# Altium PCB RF315Mhz.PcbDoc (part 3 of 5)
Units mil, origin at the board's own origin, x right, y up, seen from the top; angles counter-clockwise.
Board outline 4094.49 x 3779.53 mil, 2 copper layers (Top Layer, Bottom Layer); 180 components, 20 nets, 660 pads, 48 vias.
Unrouted connection lines stored in the file: 100.
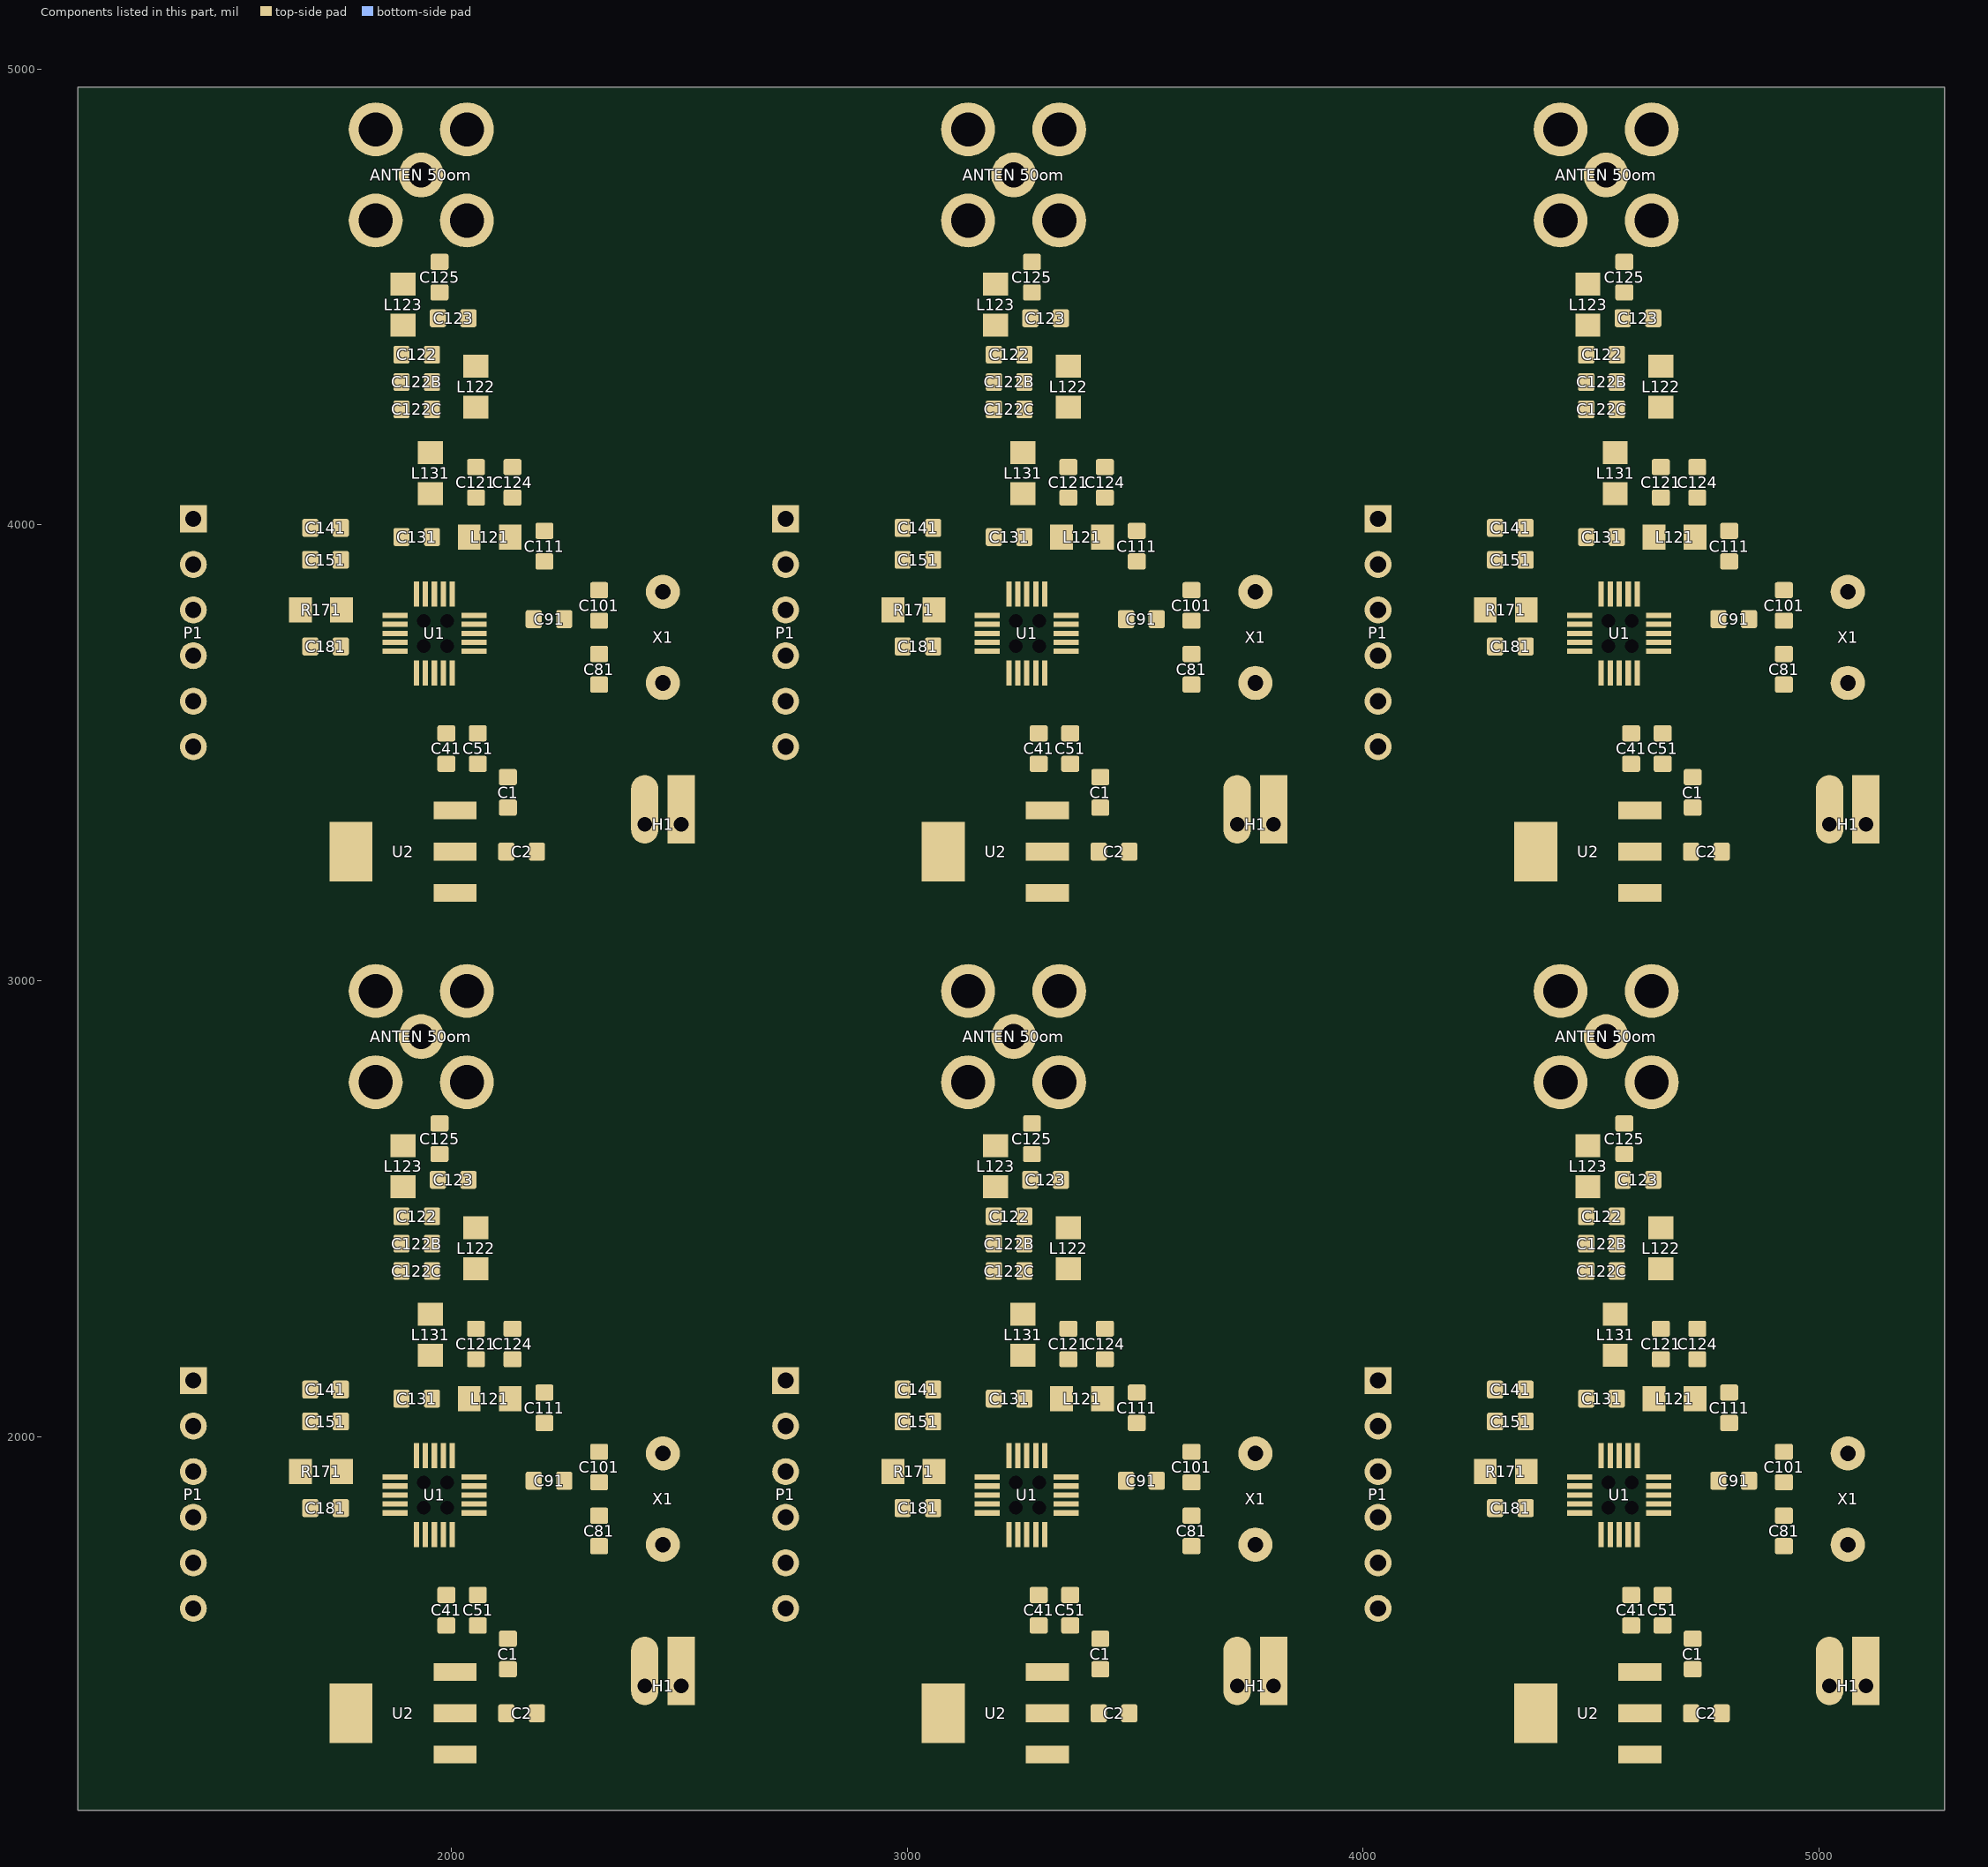
[diagram p3: the components of this part, seen from the top]

## Via types
v1: diameter 50, hole 28, Top Layer to Bottom Layer, 48 vias

## Nets (pads, with @x,y where several pads share a name; then routed paths per layer and width w, separated by ;. In a path a pad name is that pad's centre, name@x,y a point inside that pad or via, vN(x,y) a via of type N, cw(c..) or ccw(c..) an arc to the next point about the centre after c; other vN are vias at no path point) (continued)
copper on no net: (continued)
  Top Layer w1: 2516.57,4737.54 2519.57,4737.54 ; 2516.57,4738.54 2519.57,4738.54 ; 2516.57,4739.54 2519.57,4739.54 ; 2516.57,4740.54 2519.57,4740.54 ; 2516.57,4741.54 2519.57,4741.54 ; 2516.57,4742.54 2519.57,4742.54 ; 2516.57,4743.54 2519.57,4743.54 ; 2516.57,4744.54 2519.57,4744.54 ; 2516.57,4745.54 2519.57,4745.54 ; 2516.57,4746.54 2519.57,4746.54 ; 2516.57,4747.54 2519.57,4747.54 ; 2516.57,4748.54 2519.57,4748.54 ; 2516.57,4749.54 2519.57,4749.54 ; 2516.57,4750.54 2519.57,4750.54 ; 2516.57,4751.54 2519.57,4751.54 ; 2516.57,4752.54 2519.57,4752.54 ; 2516.57,4753.54 2519.57,4753.54 ; 2516.57,4754.54 2519.57,4754.54 ; 2516.57,4755.54 2519.57,4755.54 ; 2516.57,4756.54 2519.57,4756.54 ; 2516.57,4757.54 2519.57,4757.54 ; 2516.57,4758.54 2519.57,4758.54 ; 2516.57,4759.54 2519.57,4759.54 ; 2516.57,4760.54 2519.57,4760.54 ; 2516.57,4761.54 2519.57,4761.54 ; 2516.57,4762.54 2519.57,4762.54 ; 2516.57,4763.54 2519.57,4763.54 ; 2516.57,4764.54 2519.57,4764.54 ; 2516.57,4765.54 2519.57,4765.54 ; 2516.57,4766.54 2519.57,4766.54 ; 2516.57,4767.54 2519.57,4767.54 ; 2516.57,4768.54 2519.57,4768.54 ; 2516.57,4769.54 2519.57,4769.54 ; 2516.57,4770.54 2519.57,4770.54 ; 2516.57,4771.54 2519.57,4771.54 ; 2516.57,4772.54 2519.57,4772.54 ; 2516.57,4773.54 2519.57,4773.54 ; 2516.57,4774.54 2519.57,4774.54 ; 2516.57,4775.54 2519.57,4775.54 ; 2516.57,4776.54 2519.57,4776.54 ; 2516.57,4777.54 2519.57,4777.54 ; 2516.57,4778.54 2519.57,4778.54 ; 2516.57,4779.54 2519.57,4779.54 ; 2516.57,4780.54 2519.57,4780.54 ; 2516.57,4781.54 2519.57,4781.54 ; 2516.57,4782.54 2519.57,4782.54 ; 2516.57,4783.54 2519.57,4783.54 ; 2516.57,4784.54 2519.57,4784.54 ; 2516.57,4785.54 2519.57,4785.54 ; 2516.57,4786.54 2519.57,4786.54 ; 2516.57,4787.54 2519.57,4787.54 ; 2516.57,4788.54 2519.57,4788.54 ; 2516.57,4789.54 2519.57,4789.54 ; 2516.57,4790.54 2519.57,4790.54 ; 2516.57,4791.54 2519.57,4791.54 ; 2516.57,4792.54 2519.57,4792.54 ; 2516.57,4793.54 2519.57,4793.54 ; 2516.57,4794.54 2519.57,4794.54 ; 2516.57,4795.54 2519.57,4795.54 ; 2516.57,4796.54 2519.57,4796.54 ; 2516.57,4797.54 2519.57,4797.54 ; 2516.57,4798.54 2519.57,4798.54 ; 2516.57,4799.54 2519.57,4799.54 ; 2516.57,4800.54 2519.57,4800.54 ; 2516.57,4801.54 2519.57,4801.54 ; 2516.57,4802.54 2519.57,4802.54 ; 2516.57,4803.54 2519.57,4803.54 ; 2516.57,4804.54 2519.57,4804.54 ; 2516.57,4805.54 2519.57,4805.54 ; 2516.57,4806.54 2519.57,4806.54 ; 2516.57,4807.54 2519.57,4807.54 ; 2516.57,4808.54 2519.57,4808.54 ; 2516.57,4809.54 2519.57,4809.54 ; 2516.57,4810.54 2519.57,4810.54 ; 2516.57,4811.54 2519.57,4811.54 ; 2516.57,4812.54 2519.57,4812.54 ; 2516.57,4813.54 2519.57,4813.54 ; 2516.57,4814.54 2519.57,4814.54 ; 2516.57,4815.54 2519.57,4815.54 ; 2516.57,4816.54 2519.57,4816.54 ; 2516.57,4817.54 2519.57,4817.54 ; 2516.57,4818.54 2519.57,4818.54 ; 2516.57,4819.54 2519.57,4819.54 ; 2516.57,4820.54 2519.57,4820.54 ; 2516.57,4821.54 2519.57,4821.54 ; 2516.57,4822.54 2519.57,4822.54 ; 2516.57,4823.54 2519.57,4823.54 ; 2516.57,4824.54 2519.57,4824.54 ; 2516.57,4825.54 2519.57,4825.54 ; 2516.57,4826.54 2519.57,4826.54 ; 2516.57,4827.54 2519.57,4827.54 ; 2516.57,4828.54 2519.57,4828.54 ; 2516.57,4829.54 2519.57,4829.54 ; 2516.57,4830.54 2519.57,4830.54 ; 2516.57,4831.54 2519.57,4831.54 ; 2516.57,4832.54 2519.57,4832.54 ; 2516.57,4833.54 2519.57,4833.54 ; 2516.57,4834.54 2519.57,4834.54 ; 2516.57,4835.54 2519.57,4835.54 ; 2516.57,4836.54 2519.57,4836.54 ; 2516.57,4837.54 2519.57,4837.54 ; 2516.57,4838.54 2519.57,4838.54 ; 2516.57,4839.54 2519.57,4839.54 ; 2516.57,4840.54 2519.57,4840.54 ; 2516.57,4841.54 2519.57,4841.54 ; 3618.78,2807.78 3621.78,2807.78 ; 3618.78,2808.78 3621.78,2808.78 ; 3618.78,2809.78 3621.78,2809.78 ; 3618.78,2810.78 3621.78,2810.78 ; 3618.78,2811.78 3621.78,2811.78 ; 3618.78,2812.78 3621.78,2812.78 ; 3618.78,2813.78 3621.78,2813.78 ; 3618.78,2814.78 3621.78,2814.78 ; 3618.78,2815.78 3621.78,2815.78 ; 3618.78,2816.78 3621.78,2816.78 ; 3618.78,2817.78 3621.78,2817.78 ; 3618.78,2818.78 3621.78,2818.78 ; 3618.78,2819.78 3621.78,2819.78 ; 3618.78,2820.78 3621.78,2820.78 ; 3618.78,2821.78 3621.78,2821.78 ; 3618.78,2822.78 3621.78,2822.78 ; 3618.78,2823.78 3621.78,2823.78 ; 3618.78,2824.78 3621.78,2824.78 ; 3618.78,2825.78 3621.78,2825.78 ; 3618.78,2826.78 3621.78,2826.78 ; 3618.78,2827.78 3621.78,2827.78 ; 3618.78,2828.78 3621.78,2828.78 ; 3618.78,2829.78 3621.78,2829.78 ; 3618.78,2830.78 3621.78,2830.78 ; 3618.78,2831.78 3621.78,2831.78 ; 3618.78,2832.78 3621.78,2832.78 ; 3618.78,2833.78 3621.78,2833.78 ; 3618.78,2834.78 3621.78,2834.78 ; 3618.78,2835.78 3621.78,2835.78 ; 3618.78,2836.78 3621.78,2836.78 ; 3618.78,2837.78 3621.78,2837.78 ; 3618.78,2838.78 3621.78,2838.78 ; 3618.78,2839.78 3621.78,2839.78 ; 3618.78,2840.78 3621.78,2840.78 ; 3618.78,2841.78 3621.78,2841.78 ; 3618.78,2842.78 3621.78,2842.78 ; 3618.78,2843.78 3621.78,2843.78 ; 3618.78,2844.78 3621.78,2844.78 ; 3618.78,2845.78 3621.78,2845.78 ; 3618.78,2846.78 3621.78,2846.78 ; 3618.78,2847.78 3621.78,2847.78 ; 3618.78,2848.78 3621.78,2848.78 ; 3618.78,2849.78 3621.78,2849.78 ; 3618.78,2850.78 3621.78,2850.78 ; 3618.78,2851.78 3621.78,2851.78 ; 3618.78,2852.78 3621.78,2852.78 ; 3618.78,2853.78 3621.78,2853.78 ; 3618.78,2854.78 3621.78,2854.78 ; 3618.78,2855.78 3621.78,2855.78 ; 3618.78,2856.78 3621.78,2856.78 ; 3618.78,2857.78 3621.78,2857.78 ; 3618.78,2858.78 3621.78,2858.78 ; 3618.78,2859.78 3621.78,2859.78 ; 3618.78,2860.78 3621.78,2860.78 ; 3618.78,2861.78 3621.78,2861.78 ; 3618.78,2862.78 3621.78,2862.78 ; 3618.78,2863.78 3621.78,2863.78 ; 3618.78,2864.78 3621.78,2864.78 ; 3618.78,2865.78 3621.78,2865.78 ; 3618.78,2866.78 3621.78,2866.78 ; 3618.78,2867.78 3621.78,2867.78 ; 3618.78,2868.78 3621.78,2868.78 ; 3618.78,2869.78 3621.78,2869.78 ; 3618.78,2870.78 3621.78,2870.78 ; 3618.78,2871.78 3621.78,2871.78 ; 3618.78,2872.78 3621.78,2872.78 ; 3618.78,2873.78 3621.78,2873.78 ; 3618.78,2874.78 3621.78,2874.78 ; 3618.78,2875.78 3621.78,2875.78 ; 3618.78,2876.78 3621.78,2876.78 ; 3618.78,2877.78 3621.78,2877.78 ; 3618.78,2878.78 3621.78,2878.78 ; 3618.78,2879.78 3621.78,2879.78 ; 3618.78,2880.78 3621.78,2880.78 ; 3618.78,2881.78 3621.78,2881.78 ; 3618.78,2882.78 3621.78,2882.78 ; 3618.78,2883.78 3621.78,2883.78 ; 3618.78,2884.78 3621.78,2884.78 ; 3618.78,2885.78 3621.78,2885.78 ; 3618.78,2886.78 3621.78,2886.78 ; 3618.78,2887.78 3621.78,2887.78 ; 3618.78,2888.78 3621.78,2888.78 ; 3618.78,2889.78 3621.78,2889.78 ; 3618.78,2890.78 3621.78,2890.78 ; 3618.78,2891.78 3621.78,2891.78 ; 3618.78,2892.78 3621.78,2892.78 ; 3618.78,2893.78 3621.78,2893.78 ; 3618.78,2894.78 3621.78,2894.78 ; 3618.78,2895.78 3621.78,2895.78 ; 3618.78,2896.78 3621.78,2896.78 ; 3618.78,2897.78 3621.78,2897.78 ; 3618.78,2898.78 3621.78,2898.78 ; 3618.78,2899.78 3621.78,2899.78 ; 3618.78,2900.78 3621.78,2900.78 ; 3618.78,2901.78 3621.78,2901.78 ; 3618.78,2902.78 3621.78,2902.78 ; 3618.78,2903.78 3621.78,2903.78 ; 3618.78,2904.78 3621.78,2904.78 ; 3618.78,2905.78 3621.78,2905.78 ; 3618.78,2906.78 3621.78,2906.78 ; 3618.78,2907.78 3621.78,2907.78 ; 3618.78,2908.78 3621.78,2908.78 ; 3618.78,2909.78 3621.78,2909.78 ; 3618.78,2910.78 3621.78,2910.78 ; 3618.78,2911.78 3621.78,2911.78 ; 3618.78,2912.78 3621.78,2912.78 ; 3618.78,2913.78 3621.78,2913.78 ; 3618.78,2914.78 3621.78,2914.78 ; 3618.78,2915.78 3621.78,2915.78 ; 3618.78,2916.78 3621.78,2916.78 ; 3618.78,2917.78 3621.78,2917.78 ; 3618.78,2918.78 3621.78,2918.78 ; 3618.78,2919.78 3621.78,2919.78 ; 3618.78,2920.78 3621.78,2920.78 ; 3618.78,2921.78 3621.78,2921.78 ; 3618.78,2922.78 3621.78,2922.78 ; 3618.78,2923.78 3621.78,2923.78 ; 3618.78,2924.78 3621.78,2924.78 ; 3618.78,2925.78 3621.78,2925.78 ; 3618.78,2926.78 3621.78,2926.78 ; 3618.78,2927.78 3621.78,2927.78 ; 3618.78,2928.78 3621.78,2928.78 ; 3618.78,2929.78 3621.78,2929.78 ; 3618.78,2930.78 3621.78,2930.78 ; 3618.78,2931.78 3621.78,2931.78 ; 3618.78,2932.78 3621.78,2932.78 ; 3618.78,2933.78 3621.78,2933.78 ; 3618.78,2934.78 3621.78,2934.78 ; 3618.78,2935.78 3621.78,2935.78 ; 3618.78,2936.78 3621.78,2936.78 ; 3618.78,2937.78 3621.78,2937.78 ; 3618.78,2938.78 3621.78,2938.78 ; 3618.78,2939.78 3621.78,2939.78 ; 3618.78,2940.78 3621.78,2940.78 ; 3618.78,2941.78 3621.78,2941.78 ; 3618.78,2942.78 3621.78,2942.78 ; 3618.78,2943.78 3621.78,2943.78 ; 3618.78,2944.78 3621.78,2944.78 ; 3618.78,2945.78 3621.78,2945.78 ; 3618.78,2946.78 3621.78,2946.78 ; 3618.78,2947.78 3621.78,2947.78 ; 3618.78,2948.78 3621.78,2948.78 ; 3618.78,2949.78 3621.78,2949.78 ; 3618.78,2950.78 3621.78,2950.78 ; 3618.78,2951.78 3621.78,2951.78 ; 3618.78,2952.78 3621.78,2952.78 ; 3618.78,2953.78 3622.78,2953.78 ; 3618.78,4697.54 3621.78,4697.54 ; 3618.78,4698.54 3621.78,4698.54 ; 3618.78,4699.54 3621.78,4699.54 ; 3618.78,4700.54 3621.78,4700.54 ; 3618.78,4701.54 3621.78,4701.54 ; 3618.78,4702.54 3621.78,4702.54 ; 3618.78,4703.54 3621.78,4703.54 ; 3618.78,4704.54 3621.78,4704.54 ; 3618.78,4705.54 3621.78,4705.54 ; 3618.78,4706.54 3621.78,4706.54 ; 3618.78,4707.54 3621.78,4707.54 ; 3618.78,4708.54 3621.78,4708.54 ; 3618.78,4709.54 3621.78,4709.54 ; 3618.78,4710.54 3621.78,4710.54 ; 3618.78,4711.54 3621.78,4711.54 ; 3618.78,4712.54 3621.78,4712.54 ; 3618.78,4713.54 3621.78,4713.54 ; 3618.78,4714.54 3621.78,4714.54 ; 3618.78,4715.54 3621.78,4715.54 ; 3618.78,4716.54 3621.78,4716.54 ; 3618.78,4717.54 3621.78,4717.54 ; 3618.78,4718.54 3621.78,4718.54 ; 3618.78,4719.54 3621.78,4719.54 ; 3618.78,4720.54 3621.78,4720.54 ; 3618.78,4721.54 3621.78,4721.54 ; 3618.78,4722.54 3621.78,4722.54 ; 3618.78,4723.54 3621.78,4723.54 ; 3618.78,4724.54 3621.78,4724.54 ; 3618.78,4725.54 3621.78,4725.54 ; 3618.78,4726.54 3621.78,4726.54 ; 3618.78,4727.54 3621.78,4727.54 ; 3618.78,4728.54 3621.78,4728.54 ; 3618.78,4729.54 3621.78,4729.54 ; 3618.78,4730.54 3621.78,4730.54 ; 3618.78,4731.54 3621.78,4731.54 ; 3618.78,4732.54 3621.78,4732.54 ; 3618.78,4733.54 3621.78,4733.54 ; 3618.78,4734.54 3621.78,4734.54 ; 3618.78,4735.54 3621.78,4735.54 ; 3618.78,4736.54 3621.78,4736.54 ; 3618.78,4737.54 3621.78,4737.54 ; 3618.78,4738.54 3621.78,4738.54 ; 3618.78,4739.54 3621.78,4739.54 ; 3618.78,4740.54 3621.78,4740.54 ; 3618.78,4741.54 3621.78,4741.54 ; 3618.78,4742.54 3621.78,4742.54 ; 3618.78,4743.54 3621.78,4743.54 ; 3618.78,4744.54 3621.78,4744.54 ; 3618.78,4745.54 3621.78,4745.54 ; 3618.78,4746.54 3621.78,4746.54 ; 3618.78,4747.54 3621.78,4747.54 ; 3618.78,4748.54 3621.78,4748.54 ; 3618.78,4749.54 3621.78,4749.54 ; 3618.78,4750.54 3621.78,4750.54 ; 3618.78,4751.54 3621.78,4751.54 ; 3618.78,4752.54 3621.78,4752.54 ; 3618.78,4753.54 3621.78,4753.54 ; 3618.78,4754.54 3621.78,4754.54 ; 3618.78,4755.54 3621.78,4755.54 ; 3618.78,4756.54 3621.78,4756.54 ; 3618.78,4757.54 3621.78,4757.54 ; 3618.78,4758.54 3621.78,4758.54 ; 3618.78,4759.54 3621.78,4759.54 ; 3618.78,4760.54 3621.78,4760.54 ; 3618.78,4761.54 3621.78,4761.54 ; 3618.78,4762.54 3621.78,4762.54 ; 3618.78,4763.54 3621.78,4763.54 ; 3618.78,4764.54 3621.78,4764.54 ; 3618.78,4765.54 3621.78,4765.54 ; 3618.78,4766.54 3621.78,4766.54 ; 3618.78,4767.54 3621.78,4767.54 ; 3618.78,4768.54 3621.78,4768.54 ; 3618.78,4769.54 3621.78,4769.54 ; 3618.78,4770.54 3621.78,4770.54 ; 3618.78,4771.54 3621.78,4771.54 ; 3618.78,4772.54 3621.78,4772.54 ; 3618.78,4773.54 3621.78,4773.54 ; 3618.78,4774.54 3621.78,4774.54 ; 3618.78,4775.54 3621.78,4775.54 ; 3618.78,4776.54 3621.78,4776.54 ; 3618.78,4777.54 3621.78,4777.54 ; 3618.78,4778.54 3621.78,4778.54 ; 3618.78,4779.54 3621.78,4779.54 ; 3618.78,4780.54 3621.78,4780.54 ; 3618.78,4781.54 3621.78,4781.54 ; 3618.78,4782.54 3621.78,4782.54 ; 3618.78,4783.54 3621.78,4783.54 ; 3618.78,4784.54 3621.78,4784.54 ; 3618.78,4785.54 3621.78,4785.54 ; 3618.78,4786.54 3621.78,4786.54 ; 3618.78,4787.54 3621.78,4787.54 ; 3618.78,4788.54 3621.78,4788.54 ; 3618.78,4789.54 3621.78,4789.54 ; 3618.78,4790.54 3621.78,4790.54 ; 3618.78,4791.54 3621.78,4791.54 ; 3618.78,4792.54 3621.78,4792.54 ; 3618.78,4793.54 3621.78,4793.54 ; 3618.78,4794.54 3621.78,4794.54 ; 3618.78,4795.54 3621.78,4795.54 ; 3618.78,4796.54 3621.78,4796.54 ; 3618.78,4797.54 3621.78,4797.54 ; 3618.78,4798.54 3621.78,4798.54 ; 3618.78,4799.54 3621.78,4799.54 ; 3618.78,4800.54 3621.78,4800.54 ; 3618.78,4801.54 3621.78,4801.54 ; 3618.78,4802.54 3621.78,4802.54 ; 3618.78,4803.54 3621.78,4803.54 ; 3618.78,4804.54 3621.78,4804.54 ; 3618.78,4805.54 3621.78,4805.54 ; 3618.78,4806.54 3621.78,4806.54 ; 3618.78,4807.54 3621.78,4807.54 ; 3618.78,4808.54 3621.78,4808.54 ; 3618.78,4809.54 3621.78,4809.54 ; 3618.78,4810.54 3621.78,4810.54 ; 3618.78,4811.54 3621.78,4811.54 ; 3618.78,4812.54 3621.78,4812.54 ; 3618.78,4813.54 3621.78,4813.54 ; 3618.78,4814.54 3621.78,4814.54 ; 3618.78,4815.54 3621.78,4815.54 ; 3618.78,4816.54 3621.78,4816.54 ; 3618.78,4817.54 3621.78,4817.54 ; 3618.78,4818.54 3621.78,4818.54 ; 3618.78,4819.54 3621.78,4819.54 ; 3618.78,4820.54 3621.78,4820.54 ; 3618.78,4821.54 3621.78,4821.54 ; 3618.78,4822.54 3621.78,4822.54 ; 3618.78,4823.54 3621.78,4823.54 ; 3618.78,4824.54 3621.78,4824.54 ; 3618.78,4825.54 3621.78,4825.54 ; 3618.78,4826.54 3621.78,4826.54 ; 3618.78,4827.54 3621.78,4827.54 ; 3618.78,4828.54 3621.78,4828.54 ; 3618.78,4829.54 3621.78,4829.54 ; 3618.78,4830.54 3621.78,4830.54 ; 3618.78,4831.54 3621.78,4831.54 ; 3618.78,4832.54 3621.78,4832.54 ; 3618.78,4833.54 3621.78,4833.54 ; 3618.78,4834.54 3621.78,4834.54 ; 3618.78,4835.54 3621.78,4835.54 ; 3618.78,4836.54 3621.78,4836.54 ; 3618.78,4837.54 3621.78,4837.54 ; 3618.78,4838.54 3621.78,4838.54 ; 3618.78,4839.54 3621.78,4839.54 ; 3618.78,4840.54 3621.78,4840.54 ; 3618.78,4841.54 3621.78,4841.54 ; 3618.78,4842.54 3621.78,4842.54 ; 3618.78,4843.54 3622.78,4843.54 ; 3619.78,2803.78 3623.78,2803.78 ; 3619.78,2804.78 3622.78,2804.78 ; 3619.78,2805.78 3622.78,2805.78 ; 3619.78,2806.78 3622.78,2806.78 ; 3619.78,2954.78 3622.78,2954.78 ; 3619.78,2955.78 3622.78,2955.78 ; 3619.78,2956.78 3623.78,2956.78 ; 3619.78,4693.54 3623.78,4693.54 ; 3619.78,4694.54 3622.78,4694.54 ; 3619.78,4695.54 3622.78,4695.54 ; 3619.78,4696.54 3622.78,4696.54 ; 3619.78,4844.54 3622.78,4844.54 ; 3619.78,4845.54 3622.78,4845.54 ; 3619.78,4846.54 3623.78,4846.54 ; 3620.78,2801.78 3623.78,2801.78 ; 3620.78,2802.78 3623.78,2802.78 ; 3620.78,2957.78 3623.78,2957.78 ; 3620.78,2958.78 3623.78,2958.78 ; 3620.78,2959.78 3624.78,2959.78 ; 3620.78,4691.54 3623.78,4691.54 ; 3620.78,4692.54 3623.78,4692.54 ; 3620.78,4847.54 3623.78,4847.54 ; 3620.78,4848.54 3623.78,4848.54 ; 3620.78,4849.54 3624.78,4849.54 ; 3621.78,2799.78 3624.78,2799.78 ; 3621.78,2800.78 3624.78,2800.78 ; 3621.78,2960.78 3624.78,2960.78 ; 3621.78,2961.78 3625.78,2961.78 ; 3621.78,4689.54 3624.78,4689.54 ; 3621.78,4690.54 3624.78,4690.54 ; 3621.78,4850.54 3624.78,4850.54 ; 3621.78,4851.54 3625.78,4851.54 ; 3622.78,2797.78 3626.78,2797.78 ; 3622.78,2798.78 3625.78,2798.78 ; 3622.78,2962.78 3625.78,2962.78 ; 3622.78,2963.78 3626.78,2963.78 ; 3622.78,4687.54 3626.78,4687.54 ; 3622.78,4688.54 3625.78,4688.54 ; 3622.78,4852.54 3625.78,4852.54 ; 3622.78,4853.54 3626.78,4853.54 ; 3623.78,2795.78 3627.78,2795.78 ; 3623.78,2796.78 3626.78,2796.78 ; 3623.78,2964.78 3627.78,2964.78 ; 3623.78,4685.54 3627.78,4685.54 ; 3623.78,4686.54 3626.78,4686.54 ; 3623.78,4854.54 3627.78,4854.54 ; 3624.78,2794.78 3628.78,2794.78 ; 3624.78,2965.78 3628.78,2965.78 ; 3624.78,2966.78 3628.78,2966.78 ; 3624.78,4684.54 3628.78,4684.54 ; 3624.78,4855.54 3628.78,4855.54 ; 3624.78,4856.54 3628.78,4856.54 ; 3625.78,2792.78 3629.78,2792.78 ; 3625.78,2793.78 3629.78,2793.78 ; 3625.78,2967.78 3629.78,2967.78 ; 3625.78,4682.54 3629.78,4682.54 ; 3625.78,4683.54 3629.78,4683.54 ; 3625.78,4857.54 3629.78,4857.54 ; 3626.78,2791.78 3630.78,2791.78 ; 3626.78,2968.78 3630.78,2968.78 ; 3626.78,4681.54 3630.78,4681.54 ; 3626.78,4858.54 3630.78,4858.54 ; 3627.78,2790.78 3632.78,2790.78 ; 3627.78,2969.78 3631.78,2969.78 ; 3627.78,4680.54 3632.78,4680.54 ; 3627.78,4859.54 3631.78,4859.54 ; 3628.78,2789.78 3633.78,2789.78 ; 3628.78,2970.78 3633.78,2970.78 ; 3628.78,4679.54 3633.78,4679.54 ; 3628.78,4860.54 3633.78,4860.54 ; 3629.78,2788.78 3634.78,2788.78 ; 3629.78,2971.78 3634.78,2971.78 ; 3629.78,4678.54 3634.78,4678.54 ; 3629.78,4861.54 3634.78,4861.54 ; 3630.78,2972.78 3635.78,2972.78 ; 3630.78,4862.54 3635.78,4862.54 ; 3631.78,2787.78 3636.78,2787.78 ; 3631.78,2973.78 3637.78,2973.78 ; 3631.78,4677.54 3636.78,4677.54 ; 3631.78,4863.54 3637.78,4863.54 ; 3632.78,2786.78 3637.78,2786.78 ; 3632.78,4676.54 3637.78,4676.54 ; 3633.78,2785.78 3640.78,2785.78 ; 3633.78,2974.78 3639.78,2974.78 ; 3633.78,4675.54 3640.78,4675.54 ; 3633.78,4864.54 3639.78,4864.54 ; 3634.78,2975.78 3642.78,2975.78 ; 3634.78,4865.54 3642.78,4865.54 ; 3635.78,2784.78 3642.78,2784.78 ; 3635.78,2950.78 3657.78,2950.78 ; 3635.78,2951.78 3656.78,2951.78 ; 3635.78,2952.78 3655.78,2952.78 ; 3635.78,2953.78 3655.78,2953.78 ; 3635.78,2954.78 3655.78,2954.78 ; 3635.78,2955.78 3655.78,2955.78 ; 3635.78,2956.78 3654.78,2956.78 ; 3635.78,4674.54 3642.78,4674.54 ; 3635.78,4840.54 3657.78,4840.54 ; 3635.78,4841.54 3656.78,4841.54 ; 3635.78,4842.54 3655.78,4842.54 ; 3635.78,4843.54 3655.78,4843.54 ; 3635.78,4844.54 3655.78,4844.54 ; 3635.78,4845.54 3655.78,4845.54 ; 3635.78,4846.54 3654.78,4846.54 ; 3636.78,2948.78 3659.78,2948.78 ; 3636.78,2949.78 3658.78,2949.78 ; 3636.78,2957.78 3654.78,2957.78 ; 3636.78,2958.78 3653.78,2958.78 ; 3636.78,2976.78 3645.78,2976.78 ; 3636.78,4838.54 3659.78,4838.54 ; 3636.78,4839.54 3658.78,4839.54 ; 3636.78,4847.54 3654.78,4847.54 ; 3636.78,4848.54 3653.78,4848.54 ; 3636.78,4866.54 3645.78,4866.54 ; 3637.78,2783.78 3646.78,2783.78 ; 3637.78,2946.78 3661.78,2946.78 ; 3637.78,2947.78 3660.78,2947.78 ; 3637.78,2959.78 3653.78,2959.78 ; 3637.78,4673.54 3646.78,4673.54 ; 3637.78,4836.54 3661.78,4836.54 ; 3637.78,4837.54 3660.78,4837.54 ; 3637.78,4849.54 3653.78,4849.54 ; 3638.78,2800.78 3641.78,2800.78 ; 3638.78,2801.78 3647.78,2801.78 ; 3638.78,2802.78 3653.78,2802.78 ; 3638.78,2803.78 3659.78,2803.78 ; 3638.78,2804.78 3660.78,2804.78 ; 3638.78,2945.78 3662.78,2945.78 ; 3638.78,2960.78 3652.78,2960.78 ; 3638.78,2977.78 3797.78,2977.78 ; 3638.78,4690.54 3641.78,4690.54 ; 3638.78,4691.54 3647.78,4691.54 ; 3638.78,4692.54 3653.78,4692.54 ; 3638.78,4693.54 3659.78,4693.54 ; 3638.78,4694.54 3660.78,4694.54 ; 3638.78,4835.54 3662.78,4835.54 ; 3638.78,4850.54 3652.78,4850.54 ; 3638.78,4867.54 3797.78,4867.54 ; 3639.78,2782.78 3797.78,2782.78 ; 3639.78,2805.78 3661.78,2805.78 ; 3639.78,2806.78 3662.78,2806.78 ; 3639.78,2807.78 3663.78,2807.78 ; 3639.78,2808.78 3664.78,2808.78 ; 3639.78,2809.78 3665.78,2809.78 ; 3639.78,2810.78 3666.78,2810.78 ; 3639.78,2961.78 3650.78,2961.78 ; 3639.78,4672.54 3797.78,4672.54 ; 3639.78,4695.54 3661.78,4695.54 ; 3639.78,4696.54 3662.78,4696.54 ; 3639.78,4697.54 3663.78,4697.54 ; 3639.78,4698.54 3664.78,4698.54 ; 3639.78,4699.54 3665.78,4699.54 ; 3639.78,4700.54 3666.78,4700.54 ; 3639.78,4851.54 3650.78,4851.54 ; 3640.78,2811.78 3667.78,2811.78 ; 3640.78,2812.78 3668.78,2812.78 ; 3640.78,2813.78 3669.78,2813.78 ; 3640.78,2814.78 3670.78,2814.78 ; 3640.78,2815.78 3671.78,2815.78 ; 3640.78,2816.78 3672.78,2816.78 ; 3640.78,2944.78 3663.78,2944.78 ; 3640.78,4701.54 3667.78,4701.54 ; 3640.78,4702.54 3668.78,4702.54 ; 3640.78,4703.54 3669.78,4703.54 ; 3640.78,4704.54 3670.78,4704.54 ; 3640.78,4705.54 3671.78,4705.54 ; 3640.78,4706.54 3672.78,4706.54 ; 3640.78,4834.54 3663.78,4834.54 ; 3641.78,2817.78 3673.78,2817.78 ; 3641.78,2818.78 3674.78,2818.78 ; 3641.78,2819.78 3675.78,2819.78 ; 3641.78,2820.78 3676.78,2820.78 ; 3641.78,2962.78 3648.78,2962.78 ; 3641.78,2978.78 3795.78,2978.78 ; 3641.78,4707.54 3673.78,4707.54 ; 3641.78,4708.54 3674.78,4708.54 ; 3641.78,4709.54 3675.78,4709.54 ; 3641.78,4710.54 3676.78,4710.54 ; 3641.78,4852.54 3648.78,4852.54 ; 3641.78,4868.54 3795.78,4868.54 ; 3642.78,2781.78 3794.78,2781.78 ; 3642.78,2821.78 3677.78,2821.78 ; 3642.78,2943.78 3664.78,2943.78 ; 3642.78,4671.54 3794.78,4671.54 ; 3642.78,4711.54 3677.78,4711.54 ; 3642.78,4833.54 3664.78,4833.54 ; 3643.78,2822.78 3678.78,2822.78 ; 3643.78,4712.54 3678.78,4712.54 ; 3644.78,2823.78 3679.78,2823.78 ; 3644.78,2979.78 3791.78,2979.78 ; 3644.78,4713.54 3679.78,4713.54 ; 3644.78,4869.54 3791.78,4869.54 ; 3645.78,2780.78 3790.78,2780.78 ; 3645.78,2824.78 3680.78,2824.78 ; 3645.78,2894.78 3647.78,2894.78 ; 3645.78,4670.54 3790.78,4670.54 ; 3645.78,4714.54 3680.78,4714.54 ; 3645.78,4784.54 3647.78,4784.54 ; 3646.78,2825.78 3681.78,2825.78 ; 3646.78,2895.78 3650.78,2895.78 ; 3646.78,2942.78 3665.78,2942.78 ; 3646.78,4715.54 3681.78,4715.54 ; 3646.78,4785.54 3650.78,4785.54 ; 3646.78,4832.54 3665.78,4832.54 ; 3647.78,2826.78 3682.78,2826.78 ; 3647.78,2896.78 3653.78,2896.78 ; 3647.78,2941.78 3666.78,2941.78 ; 3647.78,4716.54 3682.78,4716.54 ; 3647.78,4786.54 3653.78,4786.54 ; 3647.78,4831.54 3666.78,4831.54 ; 3648.78,2827.78 3683.78,2827.78 ; 3648.78,2897.78 3656.78,2897.78 ; 3648.78,2940.78 3667.78,2940.78 ; 3648.78,4717.54 3683.78,4717.54 ; 3648.78,4787.54 3656.78,4787.54 ; 3648.78,4830.54 3667.78,4830.54 ; 3649.78,2828.78 3684.78,2828.78 ; 3649.78,2898.78 3659.78,2898.78 ; 3649.78,2939.78 3668.78,2939.78 ; 3649.78,4718.54 3684.78,4718.54 ; 3649.78,4788.54 3659.78,4788.54 ; 3649.78,4829.54 3668.78,4829.54 ; 3650.78,2829.78 3685.78,2829.78 ; 3650.78,2899.78 3661.78,2899.78 ; 3650.78,2938.78 3669.78,2938.78 ; 3650.78,4719.54 3685.78,4719.54 ; 3650.78,4789.54 3661.78,4789.54 ; 3650.78,4828.54 3669.78,4828.54 ; 3651.78,2830.78 3686.78,2830.78 ; 3651.78,2900.78 3664.78,2900.78 ; 3651.78,2937.78 3670.78,2937.78 ; 3651.78,4720.54 3686.78,4720.54 ; 3651.78,4790.54 3664.78,4790.54 ; 3651.78,4827.54 3670.78,4827.54 ; 3652.78,2831.78 3687.78,2831.78 ; 3652.78,2901.78 3667.78,2901.78 ; 3652.78,2936.78 3671.78,2936.78 ; 3652.78,4721.54 3687.78,4721.54 ; 3652.78,4791.54 3667.78,4791.54 ; 3652.78,4826.54 3671.78,4826.54 ; 3653.78,2832.78 3688.78,2832.78 ; 3653.78,2902.78 3668.78,2902.78 ; 3653.78,2935.78 3672.78,2935.78 ; 3653.78,4722.54 3688.78,4722.54 ; 3653.78,4792.54 3668.78,4792.54 ; 3653.78,4825.54 3672.78,4825.54 ; 3654.78,2833.78 3689.78,2833.78 ; 3654.78,2903.78 3669.78,2903.78 ; 3654.78,2934.78 3673.78,2934.78 ; 3654.78,4723.54 3689.78,4723.54 ; 3654.78,4793.54 3669.78,4793.54 ; 3654.78,4824.54 3673.78,4824.54 ; 3655.78,2834.78 3690.78,2834.78 ; 3655.78,2904.78 3670.78,2904.78 ; 3655.78,2933.78 3674.78,2933.78 ; 3655.78,4724.54 3690.78,4724.54 ; 3655.78,4794.54 3670.78,4794.54 ; 3655.78,4823.54 3674.78,4823.54 ; 3656.78,2835.78 3691.78,2835.78 ; 3656.78,2905.78 3671.78,2905.78 ; 3656.78,2932.78 3675.78,2932.78 ; 3656.78,4725.54 3691.78,4725.54 ; 3656.78,4795.54 3671.78,4795.54 ; 3656.78,4822.54 3675.78,4822.54 ; 3657.78,2836.78 3692.78,2836.78 ; 3657.78,2906.78 3672.78,2906.78 ; 3657.78,2931.78 3676.78,2931.78 ; 3657.78,4726.54 3692.78,4726.54 ; 3657.78,4796.54 3672.78,4796.54 ; 3657.78,4821.54 3676.78,4821.54 ; 3658.78,2837.78 3693.78,2837.78 ; 3658.78,2907.78 3708.78,2907.78 ; 3658.78,2930.78 3677.78,2930.78 ; 3658.78,4727.54 3693.78,4727.54 ; 3658.78,4797.54 3708.78,4797.54 ; 3658.78,4820.54 3677.78,4820.54 ; 3659.78,2838.78 3694.78,2838.78 ; 3659.78,2908.78 3707.78,2908.78 ; 3659.78,2929.78 3678.78,2929.78 ; 3659.78,4728.54 3694.78,4728.54 ; 3659.78,4798.54 3707.78,4798.54 ; 3659.78,4819.54 3678.78,4819.54 ; 3660.78,2839.78 3695.78,2839.78 ; 3660.78,2909.78 3706.78,2909.78 ; 3660.78,2928.78 3694.78,2928.78 ; 3660.78,4729.54 3695.78,4729.54 ; 3660.78,4799.54 3706.78,4799.54 ; 3660.78,4818.54 3694.78,4818.54 ; 3661.78,2840.78 3696.78,2840.78 ; 3661.78,2910.78 3705.78,2910.78 ; 3661.78,2927.78 3693.78,2927.78 ; 3661.78,4730.54 3696.78,4730.54 ; 3661.78,4800.54 3705.78,4800.54 ; 3661.78,4817.54 3693.78,4817.54 ; 3662.78,2841.78 3697.78,2841.78 ; 3662.78,2911.78 3704.78,2911.78 ; 3662.78,2926.78 3692.78,2926.78 ; 3662.78,4731.54 3697.78,4731.54 ; 3662.78,4801.54 3704.78,4801.54 ; 3662.78,4816.54 3692.78,4816.54 ; 3663.78,2842.78 3698.78,2842.78 ; 3663.78,2912.78 3703.78,2912.78 ; 3663.78,2925.78 3691.78,2925.78 ; 3663.78,4732.54 3698.78,4732.54 ; 3663.78,4802.54 3703.78,4802.54 ; 3663.78,4815.54 3691.78,4815.54 ; 3664.78,2843.78 3699.78,2843.78 ; 3664.78,2913.78 3702.78,2913.78 ; 3664.78,2924.78 3691.78,2924.78 ; 3664.78,4733.54 3699.78,4733.54 ; 3664.78,4803.54 3702.78,4803.54 ; 3664.78,4814.54 3691.78,4814.54 ; 3665.78,2844.78 3700.78,2844.78 ; 3665.78,2914.78 3701.78,2914.78 ; 3665.78,2923.78 3692.78,2923.78 ; 3665.78,4734.54 3700.78,4734.54 ; 3665.78,4804.54 3701.78,4804.54 ; 3665.78,4813.54 3692.78,4813.54 ; 3666.78,2845.78 3701.78,2845.78 ; 3666.78,2915.78 3700.78,2915.78 ; 3666.78,2922.78 3693.78,2922.78 ; 3666.78,4735.54 3701.78,4735.54 ; 3666.78,4805.54 3700.78,4805.54 ; 3666.78,4812.54 3693.78,4812.54 ; 3667.78,2846.78 3702.78,2846.78 ; 3667.78,2916.78 3699.78,2916.78 ; 3667.78,2921.78 3694.78,2921.78 ; 3667.78,4736.54 3702.78,4736.54 ; 3667.78,4806.54 3699.78,4806.54 ; 3667.78,4811.54 3694.78,4811.54 ; 3668.78,2847.78 3703.78,2847.78 ; 3668.78,2917.78 3698.78,2917.78 ; 3668.78,2920.78 3695.78,2920.78 ; 3668.78,4737.54 3703.78,4737.54 ; 3668.78,4807.54 3698.78,4807.54 ; 3668.78,4810.54 3695.78,4810.54 ; 3669.78,2848.78 3704.78,2848.78 ; 3669.78,2918.78 3697.78,2918.78 ; 3669.78,2919.78 3696.78,2919.78 ; 3669.78,4738.54 3704.78,4738.54 ; 3669.78,4808.54 3697.78,4808.54 ; 3669.78,4809.54 3696.78,4809.54 ; 3670.78,2849.78 3705.78,2849.78 ; 3670.78,4739.54 3705.78,4739.54 ; 3671.78,2850.78 3706.78,2850.78 ; 3671.78,4740.54 3706.78,4740.54 ; 3672.78,2851.78 3707.78,2851.78 ; 3672.78,4741.54 3707.78,4741.54 ; 3673.78,2852.78 3708.78,2852.78 ; 3673.78,4742.54 3708.78,4742.54 ; 3674.78,2853.78 3709.78,2853.78 ; 3674.78,2906.78 3709.78,2906.78 ; 3674.78,4743.54 3709.78,4743.54 ; 3674.78,4796.54 3709.78,4796.54 ; 3675.78,2854.78 3710.78,2854.78 ; 3675.78,2905.78 3710.78,2905.78 ; 3675.78,4744.54 3710.78,4744.54 ; 3675.78,4795.54 3710.78,4795.54 ; 3676.78,2855.78 3711.78,2855.78 ; 3676.78,2904.78 3711.78,2904.78 ; 3676.78,4745.54 3711.78,4745.54 ; 3676.78,4794.54 3711.78,4794.54 ; 3677.78,2856.78 3712.78,2856.78 ; 3677.78,2903.78 3712.78,2903.78 ; 3677.78,4746.54 3712.78,4746.54 ; 3677.78,4793.54 3712.78,4793.54 ; 3678.78,2857.78 3713.78,2857.78 ; 3678.78,2902.78 3713.78,2902.78 ; 3678.78,4747.54 3713.78,4747.54 ; 3678.78,4792.54 3713.78,4792.54 ; 3679.78,2858.78 3714.78,2858.78 ; 3679.78,2901.78 3714.78,2901.78 ; 3679.78,4748.54 3714.78,4748.54 ; 3679.78,4791.54 3714.78,4791.54 ; 3680.78,2859.78 3715.78,2859.78 ; 3680.78,2900.78 3715.78,2900.78 ; 3680.78,2929.78 3695.78,2929.78 ; 3680.78,4749.54 3715.78,4749.54 ; 3680.78,4790.54 3715.78,4790.54 ; 3680.78,4819.54 3695.78,4819.54 ; 3681.78,2860.78 3716.78,2860.78 ; 3681.78,2899.78 3716.78,2899.78 ; 3681.78,2930.78 3696.78,2930.78 ; 3681.78,4750.54 3716.78,4750.54 ; 3681.78,4789.54 3716.78,4789.54 ; 3681.78,4820.54 3696.78,4820.54 ; 3682.78,2861.78 3717.78,2861.78 ; 3682.78,2898.78 3717.78,2898.78 ; 3682.78,2931.78 3697.78,2931.78 ; 3682.78,4751.54 3717.78,4751.54 ; 3682.78,4788.54 3717.78,4788.54 ; 3682.78,4821.54 3697.78,4821.54 ; 3683.78,2862.78 3753.78,2862.78 ; 3683.78,2897.78 3753.78,2897.78 ; 3683.78,2932.78 3697.78,2932.78 ; 3683.78,4752.54 3753.78,4752.54 ; 3683.78,4787.54 3753.78,4787.54 ; 3683.78,4822.54 3697.78,4822.54 ; 3684.78,2863.78 3752.78,2863.78 ; 3684.78,2896.78 3752.78,2896.78 ; 3684.78,2933.78 3697.78,2933.78 ; 3684.78,4753.54 3752.78,4753.54 ; 3684.78,4786.54 3752.78,4786.54 ; 3684.78,4823.54 3697.78,4823.54 ; 3685.78,2864.78 3751.78,2864.78 ; 3685.78,2895.78 3751.78,2895.78 ; 3685.78,2934.78 3698.78,2934.78 ; 3685.78,4754.54 3751.78,4754.54 ; 3685.78,4785.54 3751.78,4785.54 ; 3685.78,4824.54 3698.78,4824.54 ; 3686.78,2865.78 3750.78,2865.78 ; 3686.78,2894.78 3750.78,2894.78 ; 3686.78,2935.78 3698.78,2935.78 ; 3686.78,4755.54 3750.78,4755.54 ; 3686.78,4784.54 3750.78,4784.54 ; 3686.78,4825.54 3698.78,4825.54 ; 3687.78,2866.78 3749.78,2866.78 ; 3687.78,2893.78 3749.78,2893.78 ; 3687.78,2936.78 3698.78,2936.78 ; 3687.78,4756.54 3749.78,4756.54 ; 3687.78,4783.54 3749.78,4783.54 ; 3687.78,4826.54 3698.78,4826.54 ; 3688.78,2867.78 3748.78,2867.78 ; 3688.78,2892.78 3748.78,2892.78 ; 3688.78,2937.78 3699.78,2937.78 ; 3688.78,4757.54 3748.78,4757.54 ; 3688.78,4782.54 3748.78,4782.54 ; 3688.78,4827.54 3699.78,4827.54 ; 3689.78,2868.78 3747.78,2868.78 ; 3689.78,2891.78 3747.78,2891.78 ; 3689.78,2938.78 3699.78,2938.78 ; 3689.78,4758.54 3747.78,4758.54 ; 3689.78,4781.54 3747.78,4781.54 ; 3689.78,4828.54 3699.78,4828.54 ; 3690.78,2869.78 3746.78,2869.78 ; 3690.78,2890.78 3746.78,2890.78 ; 3690.78,2939.78 3700.78,2939.78 ; 3690.78,4759.54 3746.78,4759.54 ; 3690.78,4780.54 3746.78,4780.54 ; 3690.78,4829.54 3700.78,4829.54 ; 3691.78,2870.78 3745.78,2870.78 ; 3691.78,2889.78 3745.78,2889.78 ; 3691.78,2940.78 3700.78,2940.78 ; 3691.78,4760.54 3745.78,4760.54 ; 3691.78,4779.54 3745.78,4779.54 ; 3691.78,4830.54 3700.78,4830.54 ; 3692.78,2871.78 3744.78,2871.78 ; 3692.78,2888.78 3744.78,2888.78 ; 3692.78,2941.78 3700.78,2941.78 ; 3692.78,4761.54 3744.78,4761.54 ; 3692.78,4778.54 3744.78,4778.54 ; 3692.78,4831.54 3700.78,4831.54 ; 3693.78,2872.78 3743.78,2872.78 ; 3693.78,2887.78 3743.78,2887.78 ; 3693.78,2942.78 3701.78,2942.78 ; 3693.78,4762.54 3743.78,4762.54 ; 3693.78,4777.54 3743.78,4777.54 ; 3693.78,4832.54 3701.78,4832.54 ; 3694.78,2873.78 3742.78,2873.78 ; 3694.78,2886.78 3742.78,2886.78 ; 3694.78,2943.78 3701.78,2943.78 ; 3694.78,4763.54 3742.78,4763.54 ; 3694.78,4776.54 3742.78,4776.54 ; 3694.78,4833.54 3701.78,4833.54 ; 3695.78,2874.78 3741.78,2874.78 ; 3695.78,2885.78 3741.78,2885.78 ; 3695.78,2944.78 3701.78,2944.78 ; 3695.78,4764.54 3741.78,4764.54 ; 3695.78,4775.54 3741.78,4775.54 ; 3695.78,4834.54 3701.78,4834.54 ; 3696.78,2875.78 3740.78,2875.78 ; 3696.78,2884.78 3740.78,2884.78 ; 3696.78,2945.78 3702.78,2945.78 ; 3696.78,4765.54 3740.78,4765.54 ; 3696.78,4774.54 3740.78,4774.54 ; 3696.78,4835.54 3702.78,4835.54 ; 3697.78,2876.78 3739.78,2876.78 ; 3697.78,2883.78 3739.78,2883.78 ; 3697.78,2946.78 3702.78,2946.78 ; 3697.78,4766.54 3739.78,4766.54 ; 3697.78,4773.54 3739.78,4773.54 ; 3697.78,4836.54 3702.78,4836.54 ; 3698.78,2877.78 3738.78,2877.78 ; 3698.78,2882.78 3738.78,2882.78 ; 3698.78,2947.78 3702.78,2947.78 ; 3698.78,4767.54 3738.78,4767.54 ; 3698.78,4772.54 3738.78,4772.54 ; 3698.78,4837.54 3702.78,4837.54 ; 3699.78,2878.78 3737.78,2878.78 ; 3699.78,2881.78 3737.78,2881.78 ; 3699.78,2948.78 3703.78,2948.78 ; 3699.78,4768.54 3737.78,4768.54 ; 3699.78,4771.54 3737.78,4771.54 ; 3699.78,4838.54 3703.78,4838.54 ; 3700.78,2879.78 3736.78,2879.78 ; 3700.78,2880.78 3736.78,2880.78 ; 3700.78,2949.78 3703.78,2949.78 ; 3700.78,4769.54 3736.78,4769.54 ; 3700.78,4770.54 3736.78,4770.54 ; 3700.78,4839.54 3703.78,4839.54 ; 3701.78,2950.78 3703.78,2950.78 ; 3701.78,4840.54 3703.78,4840.54 ; 3702.78,2951.78 3704.78,2951.78 ; 3702.78,4841.54 3704.78,4841.54 ; 3703.78,2952.78 3704.78,2952.78 ; 3703.78,4842.54 3704.78,4842.54 ; 3719.78,2861.78 3754.78,2861.78 ; 3719.78,2898.78 3754.78,2898.78 ; 3719.78,4751.54 3754.78,4751.54 ; 3719.78,4788.54 3754.78,4788.54 ; 3720.78,2860.78 3755.78,2860.78 ; 3720.78,2899.78 3755.78,2899.78 ; 3720.78,4750.54 3755.78,4750.54 ; 3720.78,4789.54 3755.78,4789.54 ; 3721.78,2859.78 3756.78,2859.78 ; 3721.78,2900.78 3756.78,2900.78 ; 3721.78,4749.54 3756.78,4749.54 ; 3721.78,4790.54 3756.78,4790.54 ; 3722.78,2858.78 3757.78,2858.78 ; 3722.78,2901.78 3757.78,2901.78 ; 3722.78,4748.54 3757.78,4748.54 ; 3722.78,4791.54 3757.78,4791.54 ; 3723.78,2857.78 3758.78,2857.78 ; 3723.78,2902.78 3758.78,2902.78 ; 3723.78,4747.54 3758.78,4747.54 ; 3723.78,4792.54 3758.78,4792.54 ; 3724.78,2856.78 3759.78,2856.78 ; 3724.78,2903.78 3759.78,2903.78 ; 3724.78,4746.54 3759.78,4746.54 ; 3724.78,4793.54 3759.78,4793.54 ; 3725.78,2855.78 3760.78,2855.78 ; 3725.78,2904.78 3760.78,2904.78 ; 3725.78,4745.54 3760.78,4745.54 ; 3725.78,4794.54 3760.78,4794.54 ; 3726.78,2854.78 3761.78,2854.78 ; 3726.78,2905.78 3761.78,2905.78 ; 3726.78,4744.54 3761.78,4744.54 ; 3726.78,4795.54 3761.78,4795.54 ; 3727.78,2853.78 3762.78,2853.78 ; 3727.78,2906.78 3762.78,2906.78 ; 3727.78,4743.54 3762.78,4743.54 ; 3727.78,4796.54 3762.78,4796.54 ; 3728.78,2852.78 3763.78,2852.78 ; 3728.78,2907.78 3778.78,2907.78 ; 3728.78,4742.54 3763.78,4742.54 ; 3728.78,4797.54 3778.78,4797.54 ; 3729.78,2851.78 3764.78,2851.78 ; 3729.78,2908.78 3777.78,2908.78 ; 3729.78,4741.54 3764.78,4741.54 ; 3729.78,4798.54 3777.78,4798.54 ; 3730.78,2850.78 3765.78,2850.78 ; 3730.78,2909.78 3776.78,2909.78 ; 3730.78,4740.54 3765.78,4740.54 ; 3730.78,4799.54 3776.78,4799.54 ; 3731.78,2849.78 3766.78,2849.78 ; 3731.78,2910.78 3775.78,2910.78 ; 3731.78,4739.54 3766.78,4739.54 ; 3731.78,4800.54 3775.78,4800.54 ; 3732.78,2848.78 3767.78,2848.78 ; 3732.78,2911.78 3774.78,2911.78 ; 3732.78,2950.78 3735.78,2950.78 ; 3732.78,2951.78 3734.78,2951.78 ; 3732.78,2952.78 3733.78,2952.78 ; 3732.78,4738.54 3767.78,4738.54 ; 3732.78,4801.54 3774.78,4801.54 ; 3732.78,4840.54 3735.78,4840.54 ; 3732.78,4841.54 3734.78,4841.54 ; 3732.78,4842.54 3733.78,4842.54 ; 3733.78,2847.78 3768.78,2847.78 ; 3733.78,2912.78 3773.78,2912.78 ; 3733.78,2948.78 3737.78,2948.78 ; 3733.78,2949.78 3736.78,2949.78 ; 3733.78,4737.54 3768.78,4737.54 ; 3733.78,4802.54 3773.78,4802.54 ; 3733.78,4838.54 3737.78,4838.54 ; 3733.78,4839.54 3736.78,4839.54 ; 3734.78,2846.78 3769.78,2846.78 ; 3734.78,2913.78 3772.78,2913.78 ; 3734.78,2945.78 3740.78,2945.78 ; 3734.78,2946.78 3739.78,2946.78 ; 3734.78,2947.78 3738.78,2947.78 ; 3734.78,4736.54 3769.78,4736.54 ; 3734.78,4803.54 3772.78,4803.54 ; 3734.78,4835.54 3740.78,4835.54 ; 3734.78,4836.54 3739.78,4836.54 ; 3734.78,4837.54 3738.78,4837.54 ; 3735.78,2845.78 3770.78,2845.78 ; 3735.78,2914.78 3771.78,2914.78 ; 3735.78,2942.78 3743.78,2942.78 ; 3735.78,2943.78 3742.78,2943.78 ; 3735.78,2944.78 3741.78,2944.78 ; 3735.78,4735.54 3770.78,4735.54 ; 3735.78,4804.54 3771.78,4804.54 ; 3735.78,4832.54 3743.78,4832.54 ; 3735.78,4833.54 3742.78,4833.54 ; 3735.78,4834.54 3741.78,4834.54 ; 3736.78,2844.78 3771.78,2844.78 ; 3736.78,2915.78 3770.78,2915.78 ; 3736.78,2939.78 3746.78,2939.78 ; 3736.78,2940.78 3745.78,2940.78 ; 3736.78,2941.78 3744.78,2941.78 ; 3736.78,4734.54 3771.78,4734.54 ; 3736.78,4805.54 3770.78,4805.54 ; 3736.78,4829.54 3746.78,4829.54 ; 3736.78,4830.54 3745.78,4830.54 ; 3736.78,4831.54 3744.78,4831.54 ; 3737.78,2843.78 3772.78,2843.78 ; 3737.78,2916.78 3769.78,2916.78 ; 3737.78,2936.78 3749.78,2936.78 ; 3737.78,2937.78 3748.78,2937.78 ; 3737.78,2938.78 3747.78,2938.78 ; 3737.78,4733.54 3772.78,4733.54 ; 3737.78,4806.54 3769.78,4806.54 ; 3737.78,4826.54 3749.78,4826.54 ; 3737.78,4827.54 3748.78,4827.54 ; 3737.78,4828.54 3747.78,4828.54 ; 3738.78,2842.78 3773.78,2842.78 ; 3738.78,2917.78 3768.78,2917.78 ; 3738.78,2933.78 3752.78,2933.78 ; 3738.78,2934.78 3751.78,2934.78 ; 3738.78,2935.78 3750.78,2935.78 ; 3738.78,4732.54 3773.78,4732.54 ; 3738.78,4807.54 3768.78,4807.54 ; 3738.78,4823.54 3752.78,4823.54 ; 3738.78,4824.54 3751.78,4824.54 ; 3738.78,4825.54 3750.78,4825.54 ; 3739.78,2841.78 3774.78,2841.78 ; 3739.78,2918.78 3767.78,2918.78 ; 3739.78,2930.78 3755.78,2930.78 ; 3739.78,2931.78 3754.78,2931.78 ; 3739.78,2932.78 3753.78,2932.78 ; 3739.78,4731.54 3774.78,4731.54 ; 3739.78,4808.54 3767.78,4808.54 ; 3739.78,4820.54 3755.78,4820.54 ; 3739.78,4821.54 3754.78,4821.54 ; 3739.78,4822.54 3753.78,4822.54 ; 3740.78,2840.78 3775.78,2840.78 ; 3740.78,2919.78 3767.78,2919.78 ; 3740.78,2929.78 3756.78,2929.78 ; 3740.78,4730.54 3775.78,4730.54 ; 3740.78,4809.54 3767.78,4809.54 ; 3740.78,4819.54 3756.78,4819.54 ; 3741.78,2839.78 3776.78,2839.78 ; 3741.78,2920.78 3768.78,2920.78 ; 3741.78,2928.78 3776.78,2928.78 ; 3741.78,4729.54 3776.78,4729.54 ; 3741.78,4810.54 3768.78,4810.54 ; 3741.78,4818.54 3776.78,4818.54 ; 3742.78,2838.78 3777.78,2838.78 ; 3742.78,2921.78 3769.78,2921.78 ; 3742.78,2927.78 3775.78,2927.78 ; 3742.78,4728.54 3777.78,4728.54 ; 3742.78,4811.54 3769.78,4811.54 ; 3742.78,4817.54 3775.78,4817.54 ; 3743.78,2837.78 3778.78,2837.78 ; 3743.78,2922.78 3770.78,2922.78 ; 3743.78,2926.78 3774.78,2926.78 ; 3743.78,4727.54 3778.78,4727.54 ; 3743.78,4812.54 3770.78,4812.54 ; 3743.78,4816.54 3774.78,4816.54 ; 3744.78,2836.78 3779.78,2836.78 ; 3744.78,2923.78 3771.78,2923.78 ; 3744.78,2925.78 3773.78,2925.78 ; 3744.78,4726.54 3779.78,4726.54 ; 3744.78,4813.54 3771.78,4813.54 ; 3744.78,4815.54 3773.78,4815.54 ; 3745.78,2835.78 3780.78,2835.78 ; 3745.78,2924.78 3772.78,2924.78 ; 3745.78,4725.54 3780.78,4725.54 ; 3745.78,4814.54 3772.78,4814.54 ; 3746.78,2834.78 3781.78,2834.78 ; 3746.78,4724.54 3781.78,4724.54 ; 3747.78,2833.78 3782.78,2833.78 ; 3747.78,4723.54 3782.78,4723.54 ; 3748.78,2832.78 3783.78,2832.78 ; 3748.78,4722.54 3783.78,4722.54 ; 3749.78,2831.78 3784.78,2831.78 ; 3749.78,4721.54 3784.78,4721.54 ; 3750.78,2830.78 3785.78,2830.78 ; 3750.78,4720.54 3785.78,4720.54 ; 3751.78,2829.78 3786.78,2829.78 ; 3751.78,4719.54 3786.78,4719.54 ; 3752.78,2828.78 3787.78,2828.78 ; 3752.78,4718.54 3787.78,4718.54 ; 3753.78,2827.78 3788.78,2827.78 ; 3753.78,4717.54 3788.78,4717.54 ; 3754.78,2826.78 3789.78,2826.78 ; 3754.78,4716.54 3789.78,4716.54 ; 3755.78,2825.78 3790.78,2825.78 ; 3755.78,4715.54 3790.78,4715.54 ; 3756.78,2824.78 3791.78,2824.78 ; 3756.78,4714.54 3791.78,4714.54 ; 3757.78,2823.78 3792.78,2823.78 ; 3757.78,4713.54 3792.78,4713.54 ; 3758.78,2822.78 3793.78,2822.78 ; 3758.78,2929.78 3777.78,2929.78 ; 3758.78,4712.54 3793.78,4712.54 ; 3758.78,4819.54 3777.78,4819.54 ; 3759.78,2821.78 3794.78,2821.78 ; 3759.78,2930.78 3778.78,2930.78 ; 3759.78,4711.54 3794.78,4711.54 ; 3759.78,4820.54 3778.78,4820.54 ; 3760.78,2820.78 3795.78,2820.78 ; 3760.78,2931.78 3779.78,2931.78 ; 3760.78,4710.54 3795.78,4710.54 ; 3760.78,4821.54 3779.78,4821.54 ; 3761.78,2819.78 3795.78,2819.78 ; 3761.78,2932.78 3780.78,2932.78 ; 3761.78,4709.54 3795.78,4709.54 ; 3761.78,4822.54 3780.78,4822.54 ; 3762.78,2818.78 3795.78,2818.78 ; 3762.78,2933.78 3781.78,2933.78 ; 3762.78,4708.54 3795.78,4708.54 ; 3762.78,4823.54 3781.78,4823.54 ; 3763.78,2817.78 3795.78,2817.78 ; 3763.78,2906.78 3779.78,2906.78 ; 3763.78,2934.78 3782.78,2934.78 ; 3763.78,4707.54 3795.78,4707.54 ; 3763.78,4796.54 3779.78,4796.54 ; 3763.78,4824.54 3782.78,4824.54 ; 3764.78,2816.78 3795.78,2816.78 ; 3764.78,2905.78 3780.78,2905.78 ; 3764.78,2935.78 3783.78,2935.78 ; 3764.78,4706.54 3795.78,4706.54 ; 3764.78,4795.54 3780.78,4795.54 ; 3764.78,4825.54 3783.78,4825.54 ; 3765.78,2815.78 3796.78,2815.78 ; 3765.78,2904.78 3781.78,2904.78 ; 3765.78,2936.78 3784.78,2936.78 ; 3765.78,4705.54 3796.78,4705.54 ; 3765.78,4794.54 3781.78,4794.54 ; 3765.78,4826.54 3784.78,4826.54 ; 3766.78,2814.78 3796.78,2814.78 ; 3766.78,2903.78 3782.78,2903.78 ; 3766.78,2937.78 3785.78,2937.78 ; 3766.78,4704.54 3796.78,4704.54 ; 3766.78,4793.54 3782.78,4793.54 ; 3766.78,4827.54 3785.78,4827.54 ; 3767.78,2813.78 3796.78,2813.78 ; 3767.78,2902.78 3783.78,2902.78 ; 3767.78,2938.78 3786.78,2938.78 ; 3767.78,4703.54 3796.78,4703.54 ; 3767.78,4792.54 3783.78,4792.54 ; 3767.78,4828.54 3786.78,4828.54 ; 3768.78,2812.78 3796.78,2812.78 ; 3768.78,2939.78 3787.78,2939.78 ; 3768.78,4702.54 3796.78,4702.54 ; 3768.78,4829.54 3787.78,4829.54 ; 3769.78,2811.78 3796.78,2811.78 ; 3769.78,2901.78 3784.78,2901.78 ; 3769.78,2940.78 3788.78,2940.78 ; 3769.78,4701.54 3796.78,4701.54 ; 3769.78,4791.54 3784.78,4791.54 ; 3769.78,4830.54 3788.78,4830.54 ; 3770.78,2810.78 3796.78,2810.78 ; 3770.78,2941.78 3789.78,2941.78 ; 3770.78,4700.54 3796.78,4700.54 ; 3770.78,4831.54 3789.78,4831.54 ; 3771.78,2809.78 3797.78,2809.78 ; 3771.78,2900.78 3785.78,2900.78 ; 3771.78,2942.78 3790.78,2942.78 ; 3771.78,4699.54 3797.78,4699.54 ; 3771.78,4790.54 3785.78,4790.54 ; 3771.78,4832.54 3790.78,4832.54 ; 3772.78,2808.78 3797.78,2808.78 ; 3772.78,2943.78 3794.78,2943.78 ; 3772.78,4698.54 3797.78,4698.54 ; 3772.78,4833.54 3794.78,4833.54 ; 3773.78,2807.78 3797.78,2807.78 ; 3773.78,2944.78 3796.78,2944.78 ; 3773.78,4697.54 3797.78,4697.54 ; 3773.78,4834.54 3796.78,4834.54 ; 3774.78,2806.78 3797.78,2806.78 ; 3774.78,2899.78 3786.78,2899.78 ; 3774.78,2945.78 3797.78,2945.78 ; 3774.78,4696.54 3797.78,4696.54 ; 3774.78,4789.54 3786.78,4789.54 ; 3774.78,4835.54 3797.78,4835.54 ; 3775.78,2805.78 3797.78,2805.78 ; 3775.78,2946.78 3798.78,2946.78 ; 3775.78,4695.54 3797.78,4695.54 ; 3775.78,4836.54 3798.78,4836.54 ; 3776.78,2804.78 3797.78,2804.78 ; 3776.78,2947.78 3799.78,2947.78 ; 3776.78,4694.54 3797.78,4694.54 ; 3776.78,4837.54 3799.78,4837.54 ; 3777.78,2803.78 3798.78,2803.78 ; 3777.78,2898.78 3787.78,2898.78 ; 3777.78,2948.78 3800.78,2948.78 ; 3777.78,4693.54 3798.78,4693.54 ; 3777.78,4788.54 3787.78,4788.54 ; 3777.78,4838.54 3800.78,4838.54 ; 3778.78,2949.78 3800.78,2949.78 ; 3778.78,4839.54 3800.78,4839.54 ; 3779.78,2950.78 3801.78,2950.78 ; 3779.78,4840.54 3801.78,4840.54 ; 3780.78,2897.78 3788.78,2897.78 ; 3780.78,2951.78 3801.78,2951.78 ; 3780.78,4787.54 3788.78,4787.54 ; 3780.78,4841.54 3801.78,4841.54 ; 3781.78,2952.78 3801.78,2952.78 ; 3781.78,2953.78 3801.78,2953.78 ; 3781.78,2954.78 3801.78,2954.78 ; 3781.78,2955.78 3801.78,2955.78 ; 3781.78,2956.78 3800.78,2956.78 ; 3781.78,4842.54 3801.78,4842.54 ; 3781.78,4843.54 3801.78,4843.54 ; 3781.78,4844.54 3801.78,4844.54 ; 3781.78,4845.54 3801.78,4845.54 ; 3781.78,4846.54 3800.78,4846.54 ; 3782.78,2802.78 3798.78,2802.78 ; 3782.78,2957.78 3800.78,2957.78 ; 3782.78,2958.78 3799.78,2958.78 ; 3782.78,4692.54 3798.78,4692.54 ; 3782.78,4847.54 3800.78,4847.54 ; 3782.78,4848.54 3799.78,4848.54 ; 3783.78,2896.78 3789.78,2896.78 ; 3783.78,2959.78 3799.78,2959.78 ; 3783.78,4786.54 3789.78,4786.54 ; 3783.78,4849.54 3799.78,4849.54 ; 3784.78,2960.78 3798.78,2960.78 ; 3784.78,4850.54 3798.78,4850.54 ; 3785.78,2961.78 3796.78,2961.78 ; 3785.78,4851.54 3796.78,4851.54 ; 3786.78,2895.78 3790.78,2895.78 ; 3786.78,4785.54 3790.78,4785.54 ; 3787.78,2962.78 3794.78,2962.78 ; 3787.78,4852.54 3794.78,4852.54 ; 3788.78,2801.78 3798.78,2801.78 ; 3788.78,4691.54 3798.78,4691.54 ; 3789.78,2894.78 3790.78,2894.78 ; 3789.78,4784.54 3790.78,4784.54 ; 3790.78,2783.78 3799.78,2783.78 ; 3790.78,4673.54 3799.78,4673.54 ; 3791.78,2976.78 3800.78,2976.78 ; 3791.78,4866.54 3800.78,4866.54 ; 3794.78,2784.78 3801.78,2784.78 ; 3794.78,2800.78 3798.78,2800.78 ; 3794.78,2975.78 3801.78,2975.78 ; 3794.78,4674.54 3801.78,4674.54 ; 3794.78,4690.54 3798.78,4690.54 ; 3794.78,4865.54 3801.78,4865.54 ; 3796.78,2785.78 3803.78,2785.78 ; 3796.78,4675.54 3803.78,4675.54 ; 3797.78,2974.78 3803.78,2974.78 ; 3797.78,4864.54 3803.78,4864.54 ; 3798.78,2786.78 3804.78,2786.78 ; 3798.78,4676.54 3804.78,4676.54 ; 3799.78,2973.78 3804.78,2973.78 ; 3799.78,4863.54 3804.78,4863.54 ; 3800.78,2787.78 3805.78,2787.78 ; 3800.78,2972.78 3806.78,2972.78 ; 3800.78,4677.54 3805.78,4677.54 ; 3800.78,4862.54 3806.78,4862.54 ; 3802.78,2788.78 3806.78,2788.78 ; 3802.78,2971.78 3807.78,2971.78 ; 3802.78,4678.54 3806.78,4678.54 ; 3802.78,4861.54 3807.78,4861.54 ; 3803.78,2789.78 3808.78,2789.78 ; 3803.78,2970.78 3808.78,2970.78 ; 3803.78,4679.54 3808.78,4679.54 ; 3803.78,4860.54 3808.78,4860.54 ; 3804.78,2790.78 3809.78,2790.78 ; 3804.78,2969.78 3809.78,2969.78 ; 3804.78,4680.54 3809.78,4680.54 ; 3804.78,4859.54 3809.78,4859.54 ; 3805.78,2791.78 3809.78,2791.78 ; 3805.78,4681.54 3809.78,4681.54 ; 3806.78,2792.78 3810.78,2792.78 ; 3806.78,2968.78 3810.78,2968.78 ; 3806.78,4682.54 3810.78,4682.54 ; 3806.78,4858.54 3810.78,4858.54 ; 3807.78,2793.78 3811.78,2793.78 ; 3807.78,2966.78 3811.78,2966.78 ; 3807.78,2967.78 3811.78,2967.78 ; 3807.78,4683.54 3811.78,4683.54 ; 3807.78,4856.54 3811.78,4856.54 ; 3807.78,4857.54 3811.78,4857.54 ; 3808.78,2794.78 3812.78,2794.78 ; 3808.78,2965.78 3812.78,2965.78 ; 3808.78,4684.54 3812.78,4684.54 ; 3808.78,4855.54 3812.78,4855.54 ; 3809.78,2795.78 3813.78,2795.78 ; 3809.78,2964.78 3813.78,2964.78 ; 3809.78,4685.54 3813.78,4685.54 ; 3809.78,4854.54 3813.78,4854.54 ; 3810.78,2796.78 3813.78,2796.78 ; 3810.78,2797.78 3814.78,2797.78 ; 3810.78,2962.78 3814.78,2962.78 ; 3810.78,2963.78 3813.78,2963.78 ; 3810.78,4686.54 3813.78,4686.54 ; 3810.78,4687.54 3814.78,4687.54 ; 3810.78,4852.54 3814.78,4852.54 ; 3810.78,4853.54 3813.78,4853.54 ; 3811.78,2798.78 3814.78,2798.78 ; 3811.78,2799.78 3815.78,2799.78 ; 3811.78,2961.78 3814.78,2961.78 ; 3811.78,4688.54 3814.78,4688.54 ; 3811.78,4689.54 3815.78,4689.54 ; 3811.78,4851.54 3814.78,4851.54 ; 3812.78,2800.78 3815.78,2800.78 ; 3812.78,2801.78 3816.78,2801.78 ; 3812.78,2958.78 3816.78,2958.78 ; 3812.78,2959.78 3815.78,2959.78 ; 3812.78,2960.78 3815.78,2960.78 ; 3812.78,4690.54 3815.78,4690.54 ; 3812.78,4691.54 3816.78,4691.54 ; 3812.78,4848.54 3816.78,4848.54 ; 3812.78,4849.54 3815.78,4849.54 ; 3812.78,4850.54 3815.78,4850.54 ; 3813.78,2802.78 3816.78,2802.78 ; 3813.78,2803.78 3816.78,2803.78 ; 3813.78,2956.78 3816.78,2956.78 ; 3813.78,2957.78 3816.78,2957.78 ; 3813.78,4692.54 3816.78,4692.54 ; 3813.78,4693.54 3816.78,4693.54 ; 3813.78,4846.54 3816.78,4846.54 ; 3813.78,4847.54 3816.78,4847.54 ; 3814.78,2804.78 3817.78,2804.78 ; 3814.78,2805.78 3817.78,2805.78 ; 3814.78,2806.78 3817.78,2806.78 ; 3814.78,2807.78 3817.78,2807.78 ; 3814.78,2952.78 3818.78,2952.78 ; 3814.78,2953.78 3817.78,2953.78 ; 3814.78,2954.78 3817.78,2954.78 ; 3814.78,2955.78 3817.78,2955.78 ; 3814.78,4694.54 3817.78,4694.54 ; 3814.78,4695.54 3817.78,4695.54 ; 3814.78,4696.54 3817.78,4696.54 ; 3814.78,4697.54 3817.78,4697.54 ; 3814.78,4842.54 3818.78,4842.54 ; 3814.78,4843.54 3817.78,4843.54 ; 3814.78,4844.54 3817.78,4844.54 ; 3814.78,4845.54 3817.78,4845.54 ; 3815.78,2808.78 3818.78,2808.78 ; 3815.78,2809.78 3818.78,2809.78 ; 3815.78,2810.78 3818.78,2810.78 ; 3815.78,2811.78 3818.78,2811.78 ; 3815.78,2812.78 3818.78,2812.78 ; 3815.78,2813.78 3818.78,2813.78 ; 3815.78,2814.78 3818.78,2814.78 ; 3815.78,2815.78 3818.78,2815.78 ; 3815.78,2816.78 3818.78,2816.78 ; 3815.78,2817.78 3818.78,2817.78 ; 3815.78,2818.78 3818.78,2818.78 ; 3815.78,2819.78 3818.78,2819.78 ; 3815.78,2820.78 3818.78,2820.78 ; 3815.78,2821.78 3818.78,2821.78 ; 3815.78,2822.78 3818.78,2822.78 ; 3815.78,2823.78 3818.78,2823.78 ; 3815.78,2824.78 3818.78,2824.78 ; 3815.78,2825.78 3818.78,2825.78 ; 3815.78,2826.78 3818.78,2826.78 ; 3815.78,2827.78 3818.78,2827.78 ; 3815.78,2828.78 3818.78,2828.78 ; 3815.78,2829.78 3818.78,2829.78 ; 3815.78,2830.78 3818.78,2830.78 ; 3815.78,2831.78 3818.78,2831.78 ; 3815.78,2832.78 3818.78,2832.78 ; 3815.78,2833.78 3818.78,2833.78 ; 3815.78,2834.78 3818.78,2834.78 ; 3815.78,2835.78 3818.78,2835.78 ; 3815.78,2836.78 3818.78,2836.78 ; 3815.78,2837.78 3818.78,2837.78 ; 3815.78,2838.78 3818.78,2838.78 ; 3815.78,2839.78 3818.78,2839.78 ; 3815.78,2840.78 3818.78,2840.78 ; 3815.78,2841.78 3818.78,2841.78 ; 3815.78,2842.78 3818.78,2842.78 ; 3815.78,2843.78 3818.78,2843.78 ; 3815.78,2844.78 3818.78,2844.78 ; 3815.78,2845.78 3818.78,2845.78 ; 3815.78,2846.78 3818.78,2846.78 ; 3815.78,2847.78 3818.78,2847.78 ; 3815.78,2848.78 3818.78,2848.78 ; 3815.78,2849.78 3818.78,2849.78 ; 3815.78,2850.78 3818.78,2850.78 ; 3815.78,2851.78 3818.78,2851.78 ; 3815.78,2852.78 3818.78,2852.78 ; 3815.78,2853.78 3818.78,2853.78 ; 3815.78,2854.78 3818.78,2854.78 ; 3815.78,2855.78 3818.78,2855.78 ; 3815.78,2856.78 3818.78,2856.78 ; 3815.78,2857.78 3818.78,2857.78 ; 3815.78,2858.78 3818.78,2858.78 ; 3815.78,2859.78 3818.78,2859.78 ; 3815.78,2860.78 3818.78,2860.78 ; 3815.78,2861.78 3818.78,2861.78 ; 3815.78,2862.78 3818.78,2862.78 ; 3815.78,2863.78 3818.78,2863.78 ; 3815.78,2864.78 3818.78,2864.78 ; 3815.78,2865.78 3818.78,2865.78 ; 3815.78,2866.78 3818.78,2866.78 ; 3815.78,2867.78 3818.78,2867.78 ; 3815.78,2868.78 3818.78,2868.78 ; 3815.78,2869.78 3818.78,2869.78 ; 3815.78,2870.78 3818.78,2870.78 ; 3815.78,2871.78 3818.78,2871.78 ; 3815.78,2872.78 3818.78,2872.78 ; 3815.78,2873.78 3818.78,2873.78 ; 3815.78,2874.78 3818.78,2874.78 ; 3815.78,2875.78 3818.78,2875.78 ; 3815.78,2876.78 3818.78,2876.78 ; 3815.78,2877.78 3818.78,2877.78 ; 3815.78,2878.78 3818.78,2878.78 ; 3815.78,2879.78 3818.78,2879.78 ; 3815.78,2880.78 3818.78,2880.78 ; 3815.78,2881.78 3818.78,2881.78 ; 3815.78,2882.78 3818.78,2882.78 ; 3815.78,2883.78 3818.78,2883.78 ; 3815.78,2884.78 3818.78,2884.78 ; 3815.78,2885.78 3818.78,2885.78